# Altium PCB UM_10.PcbDoc (part 2 of 3)
Units mil, origin at the board's own origin, x right, y up, seen from the top; angles counter-clockwise.
Board outline 3937.01 x 3937.01 mil, 4 copper layers (Top, GND_02, PWR_03, Bottom), stack 35.4 mil thick; 347 components, 178 nets, 1059 pads, 909 vias.
Unrouted connection lines stored in the file: 2.
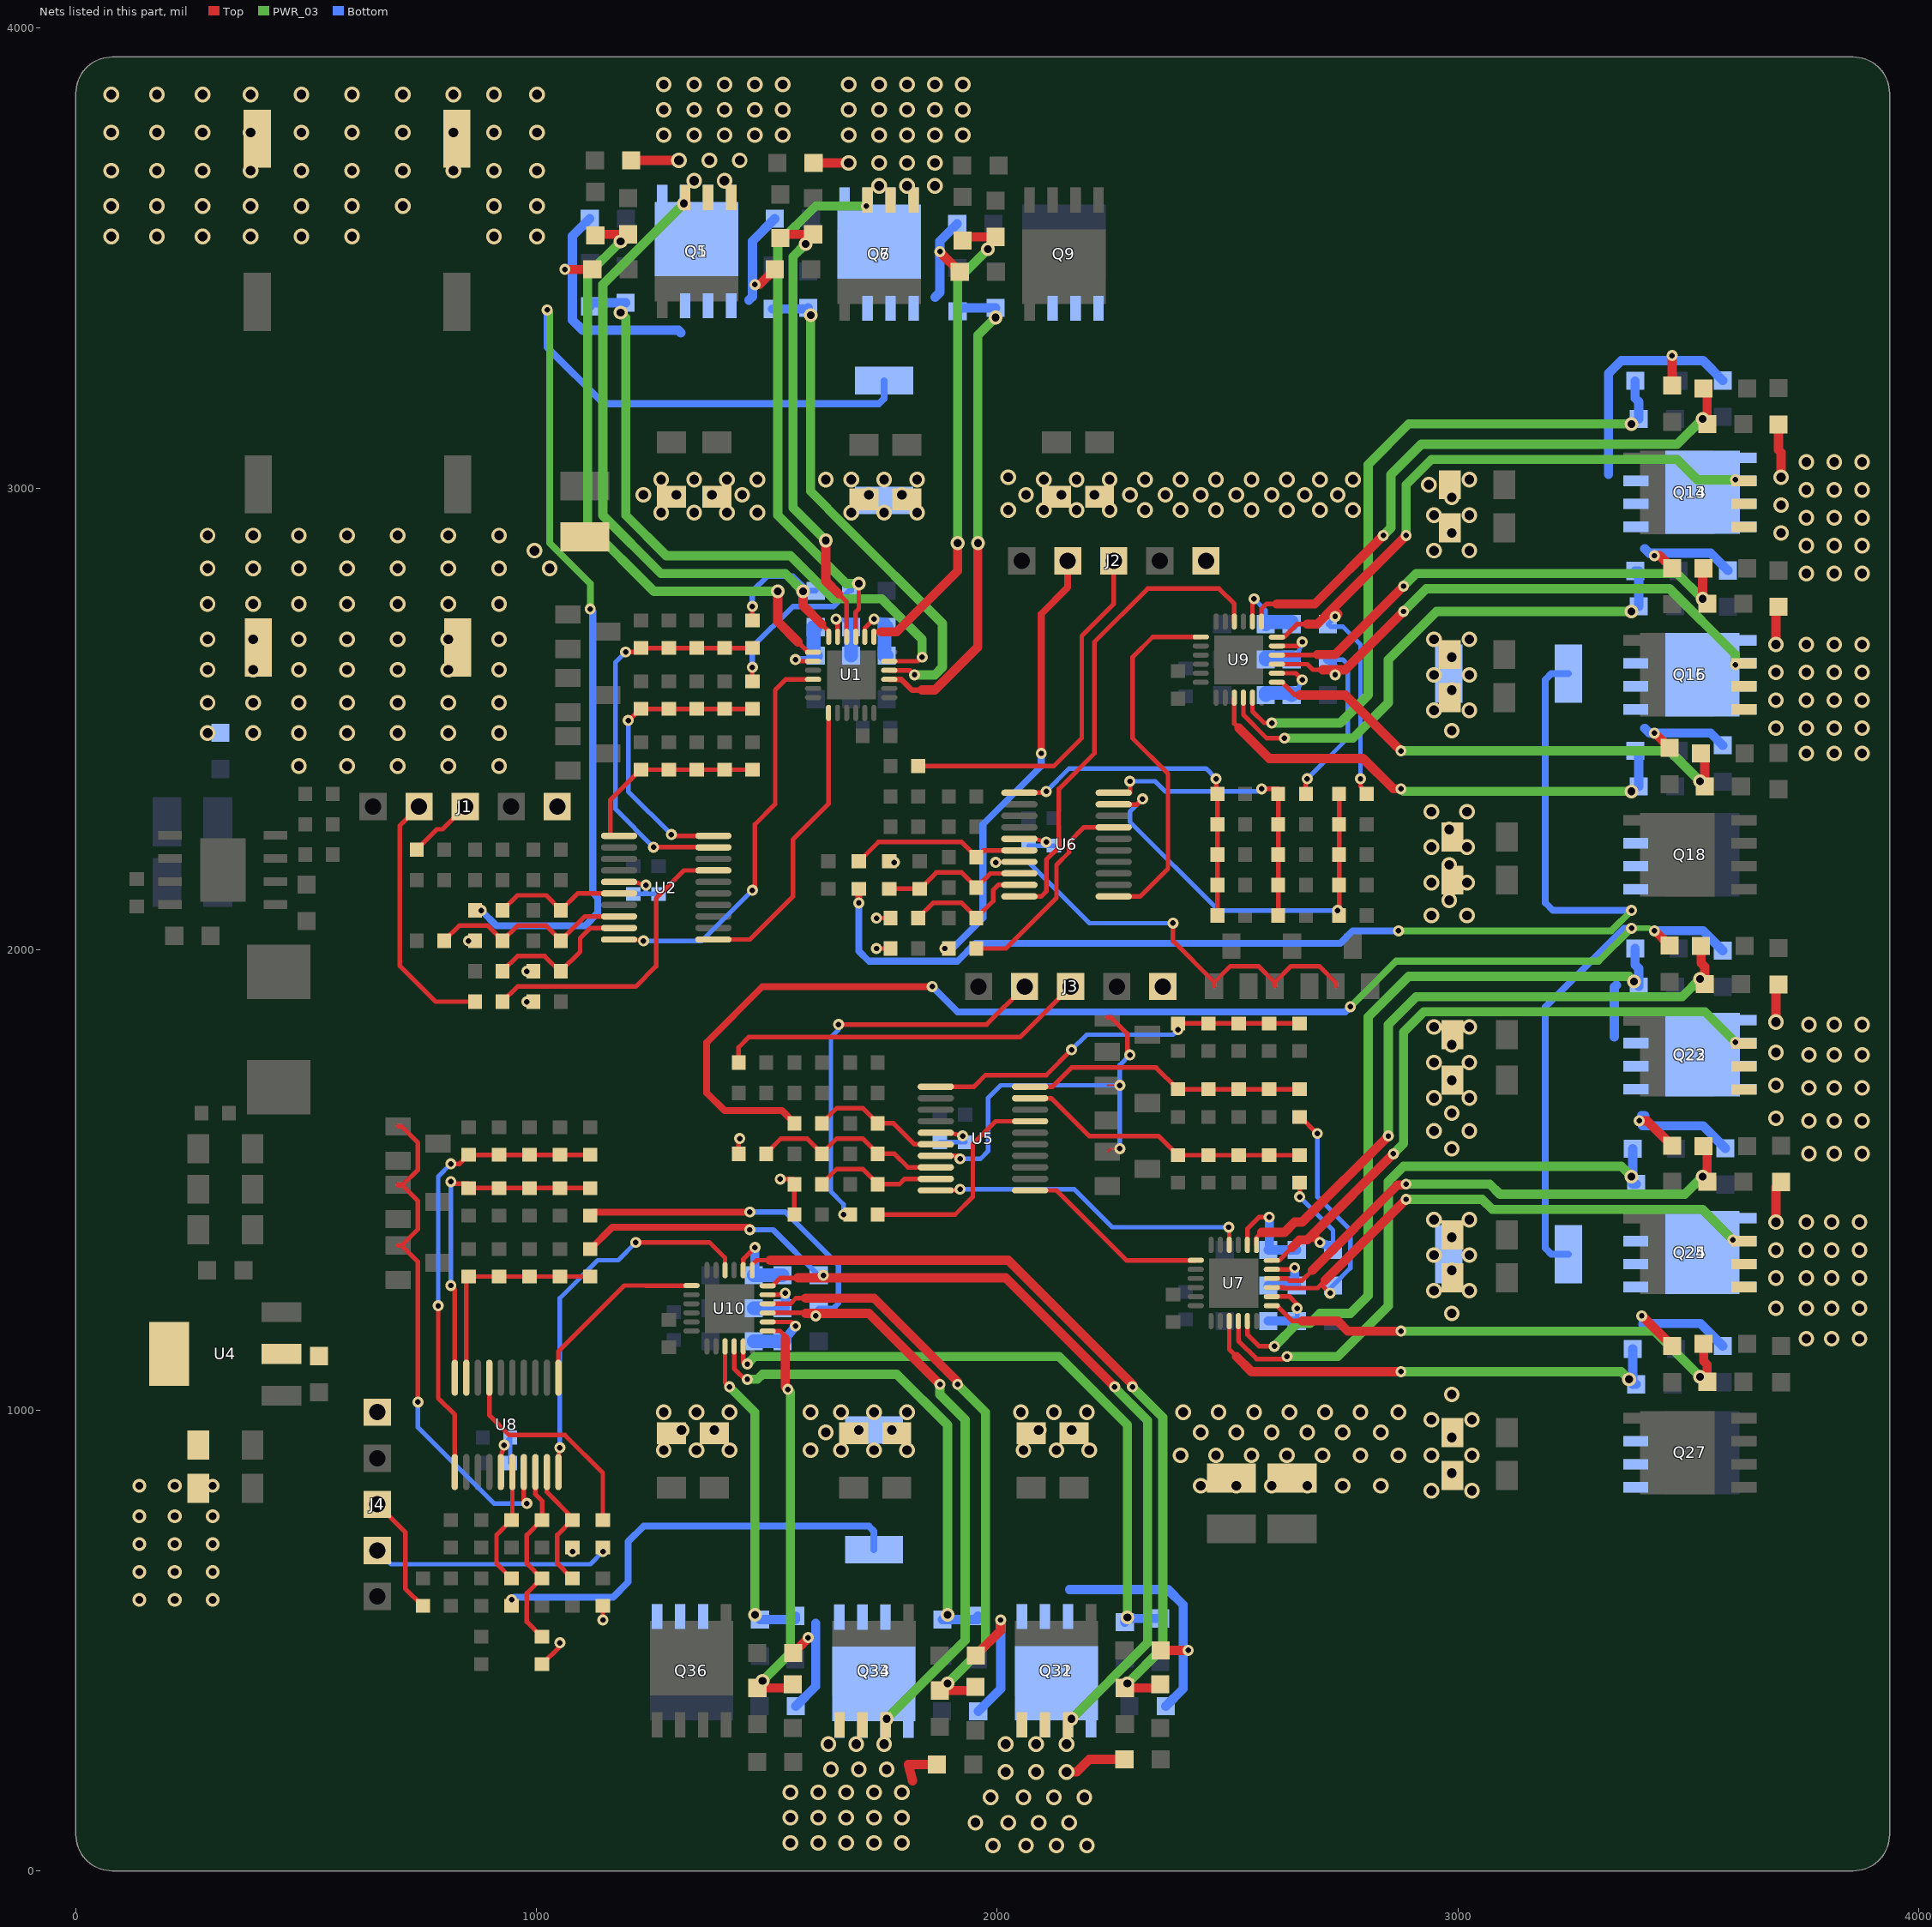
[diagram p4: the nets of this part, all layers, seen from the top]

## Via types
v1: diameter 34, hole 21, Top to Bottom, 505 vias
v2: diameter 24, hole 12, Top to Bottom, 272 vias
v3: diameter 30, hole 17, Top to Bottom, 132 vias

## Nets (pads, with @x,y where several pads share a name; then routed paths per layer and width w, separated by ;. In a path a pad name is that pad's centre, name@x,y a point inside that pad or via, vN(x,y) a via of type N, cw(c..) or ccw(c..) an arc to the next point about the centre after c; other vN are vias at no path point) (continued)
EMF_ON_2: U6.7 | length 1011.8
  Top w10: v2(1996.5,2189) 1997.5,2190 U6.7@2048.14,2190 ; v2(2381.5,2057) 2381.5,2018.5 2470.6,1929.4 2470.6,1920.19 2470.6,1928.07 2506.03,1963.5 2567.17,1963.5 2602.6,1928.07 ; 2602.6,1920.19 2602.6,1928.07 ; 2734.6,1920.19 2734.6,1928.07 2699.17,1963.5 2638.03,1963.5 2602.6,1928.07
  Bottom w10: v2(1996.5,2189) 2068,2189 2200,2057 v2(2381.5,2057)
EMF_ON_3: U5.7 | length 911.4
  Top w4: 2239.19,1560.9 2245.79,1567.5 v2(2266,1567.5) ; 2239.19,1703.9 2240.29,1705 v2(2266,1705)
  Top w10: U5.7@1866.64,1552 1913,1552 v2(1919.5,1545.5) ; 2239.19,1852.4 2247.07,1852.4 2282.5,1816.97 2282.5,1776.5 v2(2288,1771)
  Bottom w10: v2(1919.5,1545.5) 1963.5,1545.5 1980,1562 1980,1677.5 2007.5,1705 v2(2266,1705) ; v2(2266,1567.5) v2(2266,1705) ; v2(2288,1771) 2266,1749 v2(2266,1705)
EMF_ON_4: U8.7 | length 1138.1
  Top w10: 699.19,1357.4 707.07,1357.4 ; 699.19,1615.9 707.07,1615.9 742.5,1580.47 742.5,1521.6 708.68,1487.79 699.19,1487.79 699.19,1489.4 707.07,1489.4 742.5,1453.97 742.5,1392.83 707.07,1357.4 ; v2(742.5,1017.5) 742.5,1321.97 707.07,1357.4 ; U8.7@972.5,865.64 972.5,804 v2(979,797.5)
  Bottom w10: v2(742.5,1017.5) 742.5,962.5 907.5,797.5 v2(979,797.5)
EMFA_1: C14.1 R7.2 R25.2 R26.2 R27.1 U2.19 | length 877.6
  Top w10: v2(1193.5,2645.5) 1221,2645.5 1221,2648.58 R7.2@1226.5,2654.08 R27.1@1287,2654.08 C14.1@1347.5,2654.08 R26.2@1408,2654.08 R25.2@1468.5,2654.08 ; v2(1254,2222) 1383.86,2222 U2.19@1383.86,2221.5 U2.19@1383.86,2221.64
  Bottom w10: v2(1193.5,2645.5) 1171.5,2623.5 1171.5,2304.5 v2(1254,2222)
EMFA_2: C56.1 R47.2 R65.2 R66.2 R67.1 U6.19 | length 926.3
  Top w4: v2(2739,2084.5) 2742.08,2081.42 R47.2@2742.08,2073.5
  Top w10: U6.19@2252.86,2315 2252.86,2314.48 2303.48,2314.48 v2(2315.5,2326.5) ; v2(2739,2084.5) 2742.08,2087.58 R67.1@2742.08,2139.5 C56.1@2742.08,2205.5 R66.2@2742.08,2271.5 R65.2@2742.08,2337.5
  Bottom w10: v2(2315.5,2326.5) 2288,2299 2288,2277 2480.5,2084.5 v2(2739,2084.5)
EMFA_3: C73.1 R83.2 R101.2 R102.2 R103.1 U5.19 | length 636.3
  Top w10: U5.19@2071.36,1677 2117.5,1677 2199.5,1595 2350.13,1595 2391.71,1553.42 R83.2@2392.5,1553.42 R103.1@2458.5,1553.42 C73.1@2524.5,1553.42 R102.2@2590.5,1553.42 R101.2@2656.5,1553.42
EMFA_4: C99.1 R119.2 R137.2 R138.2 R139.1 U8.19 | length 485.8
  Top w10: U8.19@847.5,1070.36 847.5,1285.08 R119.2@852.5,1290.08 R139.1@918.5,1290.08 C99.1@984.5,1290.08 R138.2@1050.5,1290.08 R137.2@1116.5,1290.08
EMFB_1: C15.1 R6.2 R28.2 R29.2 R30.1 U2.20 | length 658.7
  Top w10: v2(1199,2497) 1200.63,2497 1225.71,2522.08 R6.2@1226.5,2522.08 R30.1@1287,2522.08 C15.1@1347.5,2522.08 R29.2@1408,2522.08 R28.2@1468.5,2522.08 ; v2(1292.5,2249.5) 1295.5,2246.5 U2.20@1383.86,2246.5
  Bottom w10: v2(1199,2497) 1199,2343 v2(1292.5,2249.5)
EMFB_2: C57.1 R46.2 R68.2 R69.2 R70.1 U6.20 | length 670.9
  Top w10: U6.20@2252.86,2340 2288,2340 v2(2288,2365) ; v2(2574,2348.5) 2610.08,2348.5 R68.2@2610.08,2337.5 R69.2@2610.08,2271.5 C57.1@2610.08,2205.5 R70.1@2610.08,2139.5 R46.2@2610.08,2073.5
  Bottom w10: v2(2288,2365) 2343,2365 2365,2343 2563,2343 2571.25,2351.25 v2(2574,2348.5)
EMFB_3: C74.1 R82.2 R104.2 R105.2 R106.1 U5.20 | length 621.8
  Top w10: U5.20@2071.36,1702 2120,1702 2161.5,1743.5 2344.63,1743.5 2391.71,1696.42 R82.2@2392.5,1696.42 R106.1@2458.5,1696.42 C74.1@2524.5,1696.42 R105.2@2590.5,1696.42 R104.2@2656.5,1696.42
EMFB_4: C100.1 R118.2 R140.2 R141.2 R142.1 U8.20 | length 745.7
  Top w10: v2(814,1270.5) 822.5,1262 U8.20@822.5,1070.36 ; v2(814,1496) 814,1491.29 852.5,1491.29 R118.2@852.5,1481.92 R142.1@918.5,1481.92 C100.1@984.5,1481.92 R141.2@1050.5,1481.92 R140.2@1116.5,1481.92
  Bottom w10: v2(814,1270.5) v2(814,1496)
EMFC_1: C16.1 R5.2 R31.2 R32.2 R33.1 U2.1 | length 432
  Top w10: U2.1@1179.14,2246.5 1160.5,2246.5 1160.5,2324.87 1225.71,2390.08 R5.2@1226.5,2390.08 R33.1@1287,2390.08 C16.1@1347.5,2390.08 R32.2@1408,2390.08 R31.2@1468.5,2390.08
EMFC_2: C58.1 R45.2 R71.2 R72.2 R73.1 U6.1 | length 757.8
  Top w10: U6.1@2048.14,2340 2103.5,2340 v2(2106.5,2343) ; v2(2475,2370.5) 2475,2337.5 R71.2@2478.08,2337.5 R72.2@2478.08,2271.5 C58.1@2478.08,2205.5 R73.1@2478.08,2139.5 R45.2@2478.08,2073.5
  Bottom w10: v2(2106.5,2343) 2156,2392.5 2453,2392.5 v2(2475,2370.5)
EMFC_3: C75.1 R81.2 R107.2 R108.2 R109.1 U5.1 | length 863.6
  Top w4: v2(2392.5,1826) 2389.42,1826 R81.2@2392.5,1839.42
  Top w10: U5.1@1866.64,1702 1949.5,1702 1974.5,1727 2106.5,1727 v2(2161.5,1782) v2@2156,1782 ; R81.2@2392.5,1839.42 R109.1@2458.5,1839.42 C75.1@2524.5,1839.42 R108.2@2590.5,1839.42 R107.2@2656.5,1839.42
  Bottom w10: v2(2161.5,1782) 2194.5,1815 2381.5,1815 v2(2392.5,1826)
EMFC_4: C101.1 R117.2 R143.2 R144.2 R145.1 U8.1 | length 1005.8
  Top w10: v2(786.5,1226.5) 786.5,1026 822.5,990 U8.1@822.5,865.64 ; v2(814,1534.5) 832.92,1534.5 R117.2@852.5,1554.08 R145.1@918.5,1554.08 C101.1@984.5,1554.08 R144.2@1050.5,1554.08 R143.2@1116.5,1554.08
  Bottom w10: v2(786.5,1226.5) 786.5,1507 v2(814,1534.5)
GND: C7.2 C30.2 C31.2 C32.2 C33.2 C34.2 C35.2 C36.2 C37.2 C38.2 C39.2 C40.2 C41.2 C78.2 C79.2 C80.2 C81.2 C82.2 C83.2 C84.2 C85.2 C103.2 C104.2 C105.2 C106.2 C107.2 C108.2 C109.2 C110.2 C111.2 C112.2 R35.1 R37.1 R74.1 R110.1 R146.1
  other v1: 2942.5,825 3030.5,825 2442,836 2519,836 2596,836 2673,836 2750,836 2832.5,836 2986.5,863.5 2398,902 2475,902 2552,902 2629,902 2706,902 2788.5,902 2871,902 2942.5,902 3030.5,902 1276,913 1347.5,913 1419,913 1595,913 1661,913 1732.5,913 1804,913 2057,913 2128.5,913 2200,913 2986.5,940.5 1628,951.5 2442,951.5 2519,951.5 2596,951.5 2673,951.5 2750,951.5 2832.5,951.5 1314.5,957 1386,957 1699.5,957 1771,957 2090,957 2161.5,957 2942.5,979 3030.5,979 1276,995.5 1347.5,995.5 1419,995.5 1595,995.5 1661,995.5 1732.5,995.5 1804,995.5 2051.5,995.5 2123,995.5 2194.5,995.5 2403.5,995.5 2480.5,995.5 2557.5,995.5 2634.5,995.5 2711.5,995.5 2788.5,995.5 2871,995.5 2986.5,1034 2986.5,1210 2948,1259.5 3025,1259.5 2986.5,1303.5 2948,1336.5 3025,1336.5 2986.5,1375 2948,1413.5 3025,1413.5 2986.5,1567.5 2948,1606 3025,1606 2986.5,1644.5 2948,1677.5 3025,1677.5 2986.5,1716 2948,1754.5 3025,1754.5 2986.5,1793 2948,1831.5 3025,1831.5 2942.5,2073.5 3019.5,2073.5 2981,2106.5 2942.5,2145 3019.5,2145 2981,2183.5 2942.5,2222 3019.5,2222 2981,2260.5 2942.5,2299 3019.5,2299 484,2398 588.5,2398 698.5,2398 808.5,2398 918.5,2398 286,2469.5 385,2469.5 484,2469.5 588.5,2469.5 698.5,2469.5 808.5,2469.5 918.5,2469.5 2986.5,2475 2948,2519 3025,2519 286,2535.5 385,2535.5 484,2535.5 588.5,2535.5 698.5,2535.5 808.5,2535.5 918.5,2535.5 2986.5,2563 2948,2596 3025,2596 286,2607 385,2607 484,2607 588.5,2607 698.5,2607 808.5,2607 918.5,2607 2986.5,2634.5 286,2673 385,2673 484,2673 588.5,2673 698.5,2673 808.5,2673 918.5,2673 2948,2673 3025,2673 286,2750 385,2750 484,2750 588.5,2750 698.5,2750 808.5,2750 918.5,2750 286,2827 385,2827 484,2827 588.5,2827 698.5,2827 808.5,2827 918.5,2827 1028.5,2827 995.5,2865.5 2948,2865.5 3025,2865.5 286,2898.5 385,2898.5 484,2898.5 588.5,2898.5 698.5,2898.5 808.5,2898.5 918.5,2898.5 2986.5,2904 2948,2942.5 3025,2942.5 1270.5,2948 1342,2948 1413.5,2948 1479.5,2948 1683,2948 1754.5,2948 1826,2948 2024,2953.5 2101,2953.5 2172.5,2953.5 2244,2953.5 2321,2953.5 2398,2953.5 2475,2953.5 2552,2953.5 2629,2953.5 2700.5,2953.5 2772,2953.5 2986.5,2981 1232,2986.5 1303.5,2986.5 1380.5,2986.5 1446.5,2986.5 1721.5,2986.5 1793,2986.5 2062.5,2986.5 2139.5,2986.5 2211,2986.5 2288,2986.5 2365,2986.5 2442,2986.5 2519,2986.5 2596,2986.5 2667.5,2986.5 2739,2986.5 2937,3008.5 1270.5,3019.5 1342,3019.5 1413.5,3019.5 1479.5,3019.5 1628,3019.5 1683,3019.5 1754.5,3019.5 1826,3019.5 2101,3019.5 2172.5,3019.5 2244,3019.5 2321,3019.5 2398,3019.5 2475,3019.5 2552,3019.5 2629,3019.5 2700.5,3019.5 2772,3019.5 3025,3019.5 2024,3025 77,3547.5 176,3547.5 275,3547.5 379.5,3547.5 489.5,3547.5 599.5,3547.5 907.5,3547.5 1001,3547.5 77,3613.5 176,3613.5 275,3613.5 379.5,3613.5 489.5,3613.5 599.5,3613.5 709.5,3613.5 907.5,3613.5 1001,3613.5 77,3690.5 176,3690.5 275,3690.5 379.5,3690.5 489.5,3690.5 599.5,3690.5 709.5,3690.5 819.5,3690.5 907.5,3690.5 1001,3690.5 77,3773 176,3773 275,3773 379.5,3773 489.5,3773 599.5,3773 709.5,3773 819.5,3773 907.5,3773 1001,3773 77,3855.5 176,3855.5 275,3855.5 379.5,3855.5 489.5,3855.5 599.5,3855.5 709.5,3855.5 819.5,3855.5 907.5,3855.5 1001,3855.5
HO1_1: D4.1 R9.2 U1.19 | length 1361.1
  Top w10: 1567.5,2667.5 1589.5,2645.5 1600.04,2645.5 U1.19@1600.32,2645.21
  Top w20: D4.1@1127.5,3549.76 1127.5,3552.13 R9.2@1199,3552.13 ; v3(1523.5,2777.5) 1523.5,2711.5 1567.5,2667.5
  PWR_03 w20: v3(1182.5,3536.5) 1111,3465 1111,2921.13 1254.63,2777.5 v3(1523.5,2777.5)
HO1_2: D13.1 R49.2 U9.19 | length 1307.8
  Top w10: U9.19@2573.71,2711.68 2573.71,2738.71 2585,2750 2607,2750
  Top w20: 2607,2750 2689.5,2750 v2(2838,2898.5) ; D13.1@3533.26,3217.5 3541.13,3217.5 R49.2@3541.13,3140.5
  PWR_03 w20: v2(2838,2898.5) 2854.5,2915 2854.5,3030.5 2920.5,3096.5 3476,3096.5 v3(3531,3151.5)
HO1_3: D22.1 R85.2 U7.19 | length 1438.8
  Top w10: U7.19@2562.71,1358.68 2562.71,1374.71 2574,1386
  Top w20: 2574,1386 2623.5,1386 2645.5,1408 2662,1408 v2(2849,1595) ; D22.1@3527.76,2007.5 3527.76,1970.19 3535.63,1962.31 R85.2@3535.63,1925
  PWR_03 w20: v2(2849,1595) 2849,1837 2909.5,1897.5 3487,1897.5 v3(3525.5,1936)
HO1_4: D31.1 R121.2 U10.19 | length 1746.2
  Top w10: U10.19@1468.21,1303.68 1468.21,1315.88 1477.83,1325.5 1507,1325.5
  Top w20: 1507,1325.5 2024,1325.5 2293.5,1056 v2(2293.5,1050.5) ; R121.2@2277,396.87 2354,396.87 D31.1@2354,404.74
  PWR_03 w20: v3(2282.5,407) 2359.5,484 2359.5,984.5 v2(2293.5,1050.5)
HO2_1: D6.1 R13.2 U1.16 | length 991.4
  Top w10: 1655.5,2772 1673.16,2754.34 U1.16@1673.16,2678.68
  Top w20: D6.1@1529,3544.26 1529,3552.13 R13.2@1600.5,3552.13 ; v3(1628,2887.5) 1628,2799.5 1655.5,2772
  PWR_03 w20: v3(1584,3531) 1556.5,3503.5 1556.5,2959 v3(1628,2887.5)
HO2_2: D15.1 R53.2 U9.16 | length 1088.9
  Top w10: U9.16@2607.18,2638.84 2695,2638.84 2695,2640
  Top w20: 2695,2640 2733.5,2640 v2(2882,2788.5) ; v3(3531,2761) 3531,2827 D15.1@3533.26,2827
  PWR_03 w20: v2(2882,2788.5) 2909.5,2816 3476,2816 v3(3531,2761)
HO2_3: D24.1 R89.2 U7.16 | length 1134.2
  Top w10: U7.16@2596.18,1285.84 2630.16,1285.84 2634.5,1281.5 2662,1281.5 2684,1303.5
  Top w20: 2684,1303.5 2869.08,1488.58 2887.5,1488.58 v2(2887.5,1490.5) ; D24.1@3533.26,1573 3541.13,1573 R89.2@3541.13,1496
  PWR_03 w20: v2(2887.5,1490.5) 3069,1490.5 3091,1468.5 3492.5,1468.5 v3(3531,1507)
HO2_4: D33.1 R125.2 U10.16 | length 1291.1
  Top w10: U10.16@1501.68,1230.84 1551,1230.84 1563.16,1243 1584,1243
  Top w20: 1584,1243 1732.5,1243 1914,1061.5 v2(1914,1056) ; R125.2@1875.5,391.37 1952.5,391.37 D33.1@1952.5,399.24
  PWR_03 w20: v3(1892,407) 1974.5,489.5 1974.5,995.5 v2(1914,1056)
HO3_1: D8.1 R17.2 U1.13 | length 1052.3
  Top w10: U1.13@1732.21,2678.68 1732.21,2689.21 1732.5,2689.5 1749,2689.5
  Top w20: 1749,2689.5 1782,2689.5 1914,2821.5 v3(1914,2882) ; D8.1@1925,3538.76 1925,3546.63 R17.2@1996.5,3546.63
  PWR_03 w20: v3(1914,2882) 1914,3454 v3(1980,3520)
HO3_2: D17.1 R57.2 U9.13 | length 1097.6
  Top w10: U9.13@2618,2579.5 2607.46,2579.5 U9.13@2607.18,2579.79 2618,2579.79 2645.79,2552 2656.5,2552
  Top w20: 2656.5,2552 2755.5,2552 v2(2876.5,2431) ; D17.1@3527.76,2425.5 3535.63,2425.5 R57.2@3535.63,2354
  PWR_03 w20: v2(2876.5,2431) 3459.5,2431 v3(3525.5,2365)
HO3_3: D26.1 R93.2 U7.13 | length 1079
  Top w10: U7.13@2596.18,1226.79 2607,1226.79 2640.29,1193.5 2662,1193.5
  Top w20: 2662,1193.5 2739,1193.5 2761,1171.5 v2(2876.5,1171.5) ; D26.1@3533.26,1144 3533.26,1106.69 3541.13,1098.81 R93.2@3541.13,1061.5
  PWR_03 w20: v2(2876.5,1171.5) 3426.5,1171.5 v3(3525.5,1072.5)
HO3_4: D35.1 R129.2 U10.13 | length 905.5
  Top w10: U10.13@1501.68,1171.79 1528.71,1171.79 1540,1160.5 1540,1155
  Top w20: R129.2@1479.5,396.87 1556.5,396.87 D35.1@1556.5,404.74 ; 1540,1155 1540,1050.5 v2(1545.5,1045)
  PWR_03 w20: v3(1490.5,412.5) 1551,473 1551,1039.5 v2(1545.5,1045)
IOUT_1: C10.2 C11.2 C12.2 Q5.1 Q5.2 Q5.3 Q7.1 Q7.2 Q7.3 Q9.1 Q9.2 Q9.3 R10.1 R14.1 R18.1 R35.2 R36.2 | length 3615.2
  Top w10: R36.2@866.58,2084.5 v2(880,2084.5)
  Top w20: v2(1061.5,3476) C10.2@1121.13,3476 ; v2(1474,3443) 1484.13,3443 C11.2@1517.13,3476 ; v2(1875.5,3514.5) 1875.5,3513.63 C12.2@1918.63,3470.5
  PWR_03 w15: v2(1023,3388) 1028.5,3382.5 1028.5,2882 1116.5,2794 v2(1116.5,2739)
  Bottom w15: v2(880,2084.5) 913,2051.5 1105.5,2051.5 1133,2079 1133,2112 1122,2123 1122,2733.5 v2(1116.5,2739) ; v2(1023,3388) 1023,3307.15 1145.65,3184.5 1743.5,3184.5 1754.5,3195.5 1754.5,3234.44 R35.2@1754.28,3234.66
  Bottom w20: v2(1061.5,3476) 1078,3476 ; R10.1@1115.63,3586 1078,3548.37 1078,3476 ; 1313.5,3338.5 1308,3344 1100,3344 1078,3366 1078,3476 ; 1460.76,3409.42 1468.5,3416.5 v2@1468.5,3443 ; v2(1474,3443) v2@1468.5,3443 ; R14.1@1517.13,3586 1468.5,3537.37 v2@1468.5,3443 ; 1865.15,3415.6 1875.5,3425.96 v2(1875.5,3514.5) 1875.5,3537.37 R18.1@1913.13,3575
IOUT_2: C52.2 C53.2 C54.2 Q14.1 Q14.2 Q14.3 Q16.1 Q16.2 Q16.3 Q18.1 Q18.2 Q18.3 R50.1 R54.1 R58.1 R74.2 R75.2 | length 3659.9
  Top w15: v2(1699.5,2101) R75.2@1699.5,2131.58
  Top w20: v2(3426.5,2469.5) 3427.37,2469.5 C54.2@3459.5,2437.37 ; v2(3426.5,2854.5) 3426.63,2854.63 3438.24,2854.63 C52.2@3465,2827.87 ; C53.2@3465,3223.87 v2(3465,3289)
  PWR_03 w15: v2(2871,2040.5) 3333,2040.5 v2(3377,2084.5)
  Bottom w15: v2(1699.5,2101) 1699.5,1996.5 1721.5,1974.5 1914,1974.5 1952.5,2013 2744.5,2013 2772,2040.5 v2(2871,2040.5) ; R74.2@3240.16,2598.43 3202.74,2598.43 3190,2585.69 3190,2101 3206.5,2084.5 v2(3377,2084.5)
  Bottom w20: 3327.09,3031.5 3327.09,3250.09 3355,3278 v2@3465,3278 ; 3405.5,2479.99 3415.87,2469.63 v2@3426.5,2469.63 ; 3405.5,2870 3415.5,2860 v2@3426.5,2860 ; v2(3426.5,2469.5) v2@3426.5,2469.63 ; v2(3426.5,2854.5) v2@3426.5,2860 ; v2(3465,3289) v2@3465,3278 ; R58.1@3575,2442.87 3548.24,2469.63 v2@3426.5,2469.63 ; R50.1@3575,3234.87 3531.87,3278 v2@3465,3278 ; R54.1@3586,2822.37 3548.37,2860 v2@3426.5,2860
IOUT_3: C69.2 C70.2 C71.2 Q23.1 Q23.2 Q23.3 Q25.1 Q25.2 Q25.3 Q27.1 Q27.2 Q27.3 R86.1 R90.1 R94.1 R110.2 R111.2 | length 4326.2
  Top w15: R111.2@1559.58,1622.5 1559.58,1623.29 1532.87,1650 1408,1650 1369.5,1688.5 1369.5,1798.5 1490.5,1919.5 v2(1859,1919.5)
  Top w20: v2(3393.5,1628) 3410.87,1628 C69.2@3465,1573.87 ; v2(3399,1204.5) 3399.87,1204.5 C71.2@3465,1139.37 ; v2(3426.5,2040.5) 3426.5,2041.37 C70.2@3459.5,2008.37
  PWR_03 w12: v2(3377,2046) 3415.5,2046 v2(3426.5,2040.5)
  PWR_03 w15: v2(2766.5,1875.5) 2865.5,1974.5 3305.5,1974.5 v2(3377,2046)
  Bottom w15: v2(1859,1919.5) 1914,1864.5 2755.5,1864.5 v2(2766.5,1875.5) ; R110.2@3240.16,1338.58 3202.74,1338.58 3190,1351.32 3190,1875.5 3360.5,2046 v2(3377,2046)
  Bottom w20: 3339.61,1810.5 3339.61,1918.04 3344,1922.43 ; 3402.59,1191.89 3408.43,1186.05 3401.15,1186.05 3403.11,1188 3526.37,1188 R94.1@3575,1139.37 ; 3405.5,1639 3398.57,1639 3398.57,1638.31 3398.71,1638.31 3400.71,1636.31 3400.71,1617 3531.87,1617 R90.1@3580.5,1568.37 ; v2(3426.5,2040.5) 3531.87,2040.5 R86.1@3575,1997.37
IOUT_4: C95.2 C96.2 C97.2 Q32.1 Q32.2 Q32.3 Q34.1 Q34.2 Q34.3 Q36.1 Q36.2 Q36.3 R122.1 R126.1 R130.1 R146.2 R147.2 | length 2107.1
  Top w4: R147.2@946,575.08 v2(946,588.5)
  Top w20: C97.2@1557.37,473 1589.5,505.13 v2(1589.5,506) ; C96.2@1953.37,467.5 2007.5,521.63 v2(2007.5,544.5) ; C95.2@2354.87,478.5 v2(2414.5,478.5)
  Bottom w15: v2(946,588.5) 951.5,594 1166,594 1199,627 1199,715 1232,748 1721.5,748 1732.28,737.22 R146.2@1732.28,696.85
  Bottom w20: R130.1@1562.87,357.5 1606,400.63 1606,506 ; v2(1589.5,506) 1606,506 ; 1606.22,537.3 1606,532.5 1606,506 ; R126.1@1958.87,346.5 2007.5,395.13 2007.5,532.5 v2@2006.86,544.94 ; 2157,610.64 2370.36,610.64 2403.5,577.5 v2@2403.5,478.5 ; R122.1@2365.87,357.5 2403.5,395.13 v2@2403.5,478.5 ; v2(2414.5,478.5) v2@2403.5,478.5
IS_1: C29.1 R36.1 U2.6 | length 296
  Top w10: R36.1@926.42,2084.5 926.42,2085.29 958.63,2117.5 1020.71,2117.5 C29.1@1052.92,2085.29 ; C29.1@1052.92,2084.5 C29.1@1052.92,2085.29 ; U2.6@1179.14,2121.5 1089.13,2121.5 C29.1@1052.92,2085.29
IS_2: C59.1 R75.1 U6.6 | length 386.2
  Top w10: R75.1@1699.5,2191.42 1700.29,2191.42 1741.87,2233 1922.71,2233 1954.92,2200.79 C59.1@1954.92,2200 1969.92,2215 U6.6@2048.14,2215
IS_3: C76.1 R111.1 U5.6 | length 294.3
  Top w10: R111.1@1619.42,1622.5 1619.42,1623.29 1651.63,1655.5 1708.21,1655.5 1740.42,1623.29 C76.1@1740.42,1622.5 1775,1622.5 1820.5,1577 U5.6@1866.64,1577
IS_4: C102.1 R147.1 U8.6 | length 259.6
  Top w10: R147.1@946,634.92 945.21,634.92 913,667.13 913,729.21 945.21,761.42 C102.1@946,761.42 947.5,762.92 U8.6@947.5,865.64
LO1_1: D5.1 R11.2 U1.11 | length 1398.1
  Top w10: U1.11@1765.68,2625.53 1828.03,2625.53 v2(1837,2634.5)
  PWR_03 w20: v3(1182.5,3382.5) 1193.5,3371.5 1193.5,2942.5 1281.5,2854.5 1551,2854.5 1644.5,2761 1749,2761 1837,2673 v2(1837,2634.5)
  Bottom w20: D5.1@1116.5,3395.76 1116.5,3403.63 R11.2@1193.5,3403.63
LO1_2: D14.1 R51.2 U9.11 | length 1533.4
  Top w10: U9.11@2554.03,2546.32 2554.03,2516.97 2579.5,2491.5 v2(2596,2491.5)
  PWR_03 w20: v2(2596,2491.5) 2744.5,2491.5 2805,2552 2805,3052.5 2893,3140.5 v3(3377,3140.5)
  Bottom w10: v3(3377,3140.5) 3378.16,3139.34 3391.47,3152.66 3391.47,3151.5 R51.2@3392.63,3151.5
  Bottom w20: D14.1@3384.76,3234 3384.76,3196.69 3392.63,3188.81 R51.2@3392.63,3151.5
LO1_3: D23.1 R87.2 U7.11 | length 1656.7
  Top w10: U7.11@2543.03,1193.32 2543.03,1163.97 2568.5,1138.5 v2(2601.5,1138.5)
  PWR_03 w20: v2(2601.5,1138.5) 2651,1188 2678.5,1188 2700.5,1210 2766.5,1210 2805,1248.5 2805,1853.5 2893,1941.5 3371.5,1941.5 v3(3382.5,1930.5)
  Bottom w20: D23.1@3384.76,2002 3384.76,1966.74 3392.63,1958.87 R87.2@3392.63,1919.5
LO1_4: D32.1 R123.2 U10.11 | length 1443.8
  Top w10: U10.11@1448.53,1138.32 1448.53,1103.47 1454.75,1097.25 v2(1457.5,1100)
  PWR_03 w20: v2(1457.5,1100) 1474,1116.5 2134,1116.5 2282.5,968 v3(2282.5,550)
  Bottom w20: R123.2@2277,539.87 2277,547.74 D32.1@2354,547.74
LO2_1: D7.1 R15.2 U1.10 | length 1088.2
  Top w10: U1.10@1765.68,2605.84 1810.66,2605.84 v2(1820.5,2596)
  PWR_03 w20: v3(1595,3377) 1595,2994.83 1671.26,2917.16 1881,2707.42 1881,2612.5 1864.5,2596 v2(1820.5,2596)
  Bottom w20: D7.1@1512.5,3390.26 1589.5,3390.26 R15.2@1589.5,3392.63
LO2_2: D16.1 R55.2 U9.10 | length 1154.4
  Top w10: U9.10@2534.34,2546.32 2534.34,2509.16 2585,2458.5 v2(2623.5,2458.5)
  PWR_03 w20: v2(2623.5,2458.5) 2772,2458.5 2849,2535.5 2849,2629 2953.5,2733.5 v3(3377,2733.5)
  Bottom w20: D16.1@3384.76,2821.5 3392.63,2821.5 R55.2@3392.63,2744.5
LO2_3: D25.1 R91.2 U7.10 | length 1337.7
  Top w10: U7.10@2523.34,1193.32 2523.34,1150.66 2563,1111 2623.5,1111 v2(2629,1116.5)
  PWR_03 w20: v2(2629,1116.5) 2739,1116.5 2849,1226.5 2849,1496 2882,1529 3355,1529 v3(3377,1507)
  Bottom w20: D25.1@3379.26,1567.5 3379.26,1490.5 R91.2@3387.13,1490.5
LO2_4: D34.1 R127.2 U10.10 | length 1076.2
  Top w10: U10.10@1428.84,1138.32 1428.84,1090.16 1457.5,1061.5 v2(1457.5,1067)
  PWR_03 w20: v2(1457.5,1067) 1479.5,1067 1490.5,1078 1782,1078 1892,968 v3(1892,555.5)
  Bottom w20: R127.2@1881,545.37 1958,545.37 D34.1@1958,553.24
LO3_1: D9.1 R19.2 U1.9 | length 1057.4
  Top w12: U1.9@1765.68,2586.16 1791.84,2586.16 1815,2563 1837,2563
  Top w20: 1837,2563 1864.5,2563 1958,2656.5 v3(1958,2882)
  PWR_03 w20: v3(1958,2882) 1958,3333 v3(1996.5,3371.5)
  Bottom w20: D9.1@1914,3384.76 1921.87,3392.63 R19.2@1996.5,3392.63
LO3_2: D18.1 R59.2 U9.9 | length 1064.2
  Top w10: U9.9@2514.66,2546.32 2514.66,2490.34 2524.5,2480.5
  Top w20: 2524.5,2480.5 2590.5,2414.5 2794,2414.5 2860,2348.5 v2(2876.5,2348.5)
  PWR_03 w20: v2(2876.5,2348.5) 2882,2343 v3(3377,2343)
  Bottom w20: D18.1@3384.76,2431 3392.63,2431 R59.2@3392.63,2354
LO3_3: D27.1 R95.2 U7.9 | length 1041.1
  Top w10: U7.9@2503.66,1193.32 2503.66,1131.84 2519,1116.5
  Top w20: 2519,1116.5 2552,1083.5 v2(2876.5,1083.5)
  PWR_03 w20: v2(2876.5,1083.5) 3355,1083.5 v3(3371.5,1067)
  Bottom w20: D27.1@3379.26,1133 3379.26,1056 R95.2@3387.13,1056
LO3_4: D36.1 R131.2 U10.9 | length 694.6
  Top w10: U10.9@1409.16,1138.32 1409.16,1060.34 v2(1419,1050.5)
  PWR_03 w20: v2(1419,1050.5) 1474,995.5 v3(1474,555.5)
  Bottom w20: R131.2@1485,545.37 1562,545.37 D36.1@1562,553.24
M_1: J1.4 R38.1 | length 558.8
  Top w10: J1.4@745,2310 703,2268 703,1964.5 781,1886.5 R38.1@866.58,1886.5
M_2: J2.4 R76.1 | length 970.1
  Top w4: v2(1886.5,2002) R76.1@1895.08,2002
  Top w15: v2(2095.5,2425.5) 2095.5,2728 2153,2785.5 J2.4@2153,2843.5
  Bottom w15: v2(1886.5,2002) 1903,2002 1969,2068 1969,2271.5 2095.5,2398 v2(2095.5,2425.5)
M_3: J3.4 R112.1 | length 883
  Top w10: v2(1655.5,1837) 1977,1837 J3.4@2059.5,1919.5 ; v2(1666.5,1424.5) R112.1@1680.58,1424.5
  Bottom w10: v2(1655.5,1837) 1655.5,1826 1639,1809.5 1639,1474 1666.5,1446.5 v2(1666.5,1424.5)
M_4: J4.4 R148.1 | length 521.9
  Top w10: v2(1144,693) R148.1@1144,701.58
  Bottom w10: J4.4@654.5,695.5 684.5,665.5 1116.5,665.5 v2(1144,693)
MO_1: R38.2 U2.17 | length 662.4
  Top w10: R38.2@926.42,1886.5 926.42,1887.29 958.63,1919.5 1215.5,1919.5 1259.5,1963.5 1259.5,2111 1320,2171.5 U2.17@1383.86,2171.5
MO_2: R76.2 U6.17 | length 461.7
  Top w10: R76.2@1954.92,2002 2018.5,2002 2128.5,2112 2128.5,2183.5 2156,2211 2156,2233 2188,2265 U6.17@2252.86,2265
MO_3: R112.2 U5.17 | length 481.9
  Top w10: R112.2@1740.42,1424.5 1908.5,1424.5 1947,1463 1947,1577.5 1996.5,1627 U5.17@2071.36,1627
MO_4: R148.2 U8.17 | length 481.9
  Top w10: U8.17@897.5,1070.36 897.5,989 940.5,946 1061.5,946 1144,863.5 R148.2@1144,761.42
PWM_1: J1.3 R1.1 | length 144.1
  Top w10: R1.1@740.08,2216.5 740.08,2217.29 783.48,2260.69 795.69,2260.69 J1.3@845,2310
PWM_2: J2.3 R41.1 | length 793.9
  Top w10: R41.1@1828.42,2398 2123,2398 2183.5,2458.5 2183.5,2680.5 2253,2750 J2.3@2253,2843.5
PWM_3: J3.3 R77.1 | length 808.6
  Top w10: R77.1@1438.58,1754.5 1438.58,1787.5 1460.58,1809.5 2049.5,1809.5 J3.3@2159.5,1919.5
PWM_4: J4.3 R113.1 | length 261.9
  Top w10: J4.3@654.5,795.5 715,735 715,612.79 752.71,575.08 R113.1@753.5,575.08
S_1: C13.1 R20.1 R21.2 U2.8 | length 456.6
  Top w10: R21.2@799.92,2018.5 799.92,2019.29 832.13,2051.5 894.21,2051.5 R20.1@926.42,2019.29 ; R20.1@926.42,2018.5 R20.1@926.42,2019.29 ; C13.1@1052.92,2018.5 C13.1@1052.92,2019.29 ; U2.8@1179.14,2071.5 1105.13,2071.5 C13.1@1052.92,2019.29 ; R20.1@926.42,2019.29 958.63,2051.5 1020.71,2051.5 C13.1@1052.92,2019.29
S_2: C55.1 R60.1 R61.2 U6.8 | length 324
  Top w10: R60.1@1765.5,2131.58 R61.2@1831.5,2131.58 1832.29,2131.58 1867.71,2167 1922.71,2167 C55.1@1954.92,2134.79 ; C55.1@1954.92,2134 C55.1@1954.92,2134.79 ; U6.8@2048.14,2165 1985.13,2165 C55.1@1954.92,2134.79
S_3: C72.1 R96.1 R97.2 U5.8 | length 436.2
  Top w10: R96.1@1498.42,1556.5 1498.42,1557.29 1530.63,1589.5 1587.21,1589.5 R97.2@1619.42,1557.29 ; R97.2@1619.42,1556.5 R97.2@1619.42,1557.29 ; U5.8@1866.64,1527 1806.07,1527 1776.57,1556.5 C72.1@1740.42,1556.5 1740.42,1557.29 1708.21,1589.5 1651.63,1589.5 R97.2@1619.42,1557.29
S_4: C98.1 R132.1 R133.2 U8.8 | length 419
  Top w10: U8.8@997.5,865.64 997.5,817.5 1012,803 C98.1@1012,761.42 1011.21,761.42 979,729.21 979,667.13 R133.2@1011.21,634.92 ; R132.1@1012,508.42 1011.21,508.42 979,540.63 979,602.71 R133.2@1011.21,634.92 ; R133.2@1012,634.92 R133.2@1011.21,634.92
T_1: R22.1 R23.2 U2.9 | length 338.1
  Top w10: R23.2@926.42,1952.5 926.42,1953.29 958.63,1985.5 1017.5,1985.5 1051.32,1951.68 1051.32,1952.5 R22.1@1052.92,1952.5 1052.92,1953.29 1094.5,1994.87 1094.5,2024 1117,2046.5 U2.9@1179.14,2046.5
T_2: R62.1 R63.2 U6.9 | length 291.6
  Top w10: R62.1@1828.42,2068 1828.42,2068.79 1860.63,2101 1922.71,2101 R63.2@1954.92,2068.79 ; R63.2@1954.92,2068 R63.2@1954.92,2068.79 ; U6.9@2048.14,2140 2002,2140 1991,2129 1991,2104.87 R63.2@1954.92,2068.79
T_3: R98.1 R99.2 U5.9 | length 280.2
  Top w10: R98.1@1619.42,1490.5 1619.42,1491.29 1651.63,1523.5 1708.21,1523.5 1740.42,1491.29 R99.2@1740.42,1490.5 1787.5,1490.5 1799,1502 U5.9@1866.64,1502
T_4: R134.1 R135.2 U8.9 | length 282
  Top w10: U8.9@1022.5,865.64 1022.5,822.02 1078,766.52 R134.1@1078,761.42 1077.21,761.42 1045,729.21 1045,667.13 1077.21,634.92 R135.2@1078,634.92
U_1: C2.2 Q1.1 Q1.2 Q1.3 Q5.5 Q5.6 Q5.7 Q5.8 Q5.9 R8.1 R25.1 U1.18 | length 1758.7
  Top w4: v3(1320,3619) 1320,3629.51 Q1.3@1322.5,3632.01
  Top w10: R25.1@1468.5,2713.92 v2(1468.5,2744.5) ; 1618.98,2706 1634.1,2690.88 U1.18@1634.1,2678.68 U1.18@1634.1,2688.9
  Top w20: R8.1@1205.37,3712.5 v1(1309,3712.5) ; v3(1578.5,2777.5) 1578.5,2746.48 1618.98,2706
  PWR_03 w20: v3(1320,3619) 1144,3443 1144,2942 1270,2816 1540,2816 v3(1578.5,2777.5)
  Bottom w10: v3(1578.5,2777.5) 1606,2777.5 C2.2@1606,2778.37
  Bottom w12: v2(1468.5,2744.5) 1468.5,2777.5 1501.5,2810.5 1556.5,2810.5 1588.63,2778.37 C2.2@1606,2778.37
  other v1: 1342,3668.5 1408,3668.5 1375,3712.5 1441,3712.5 1276,3767.5 1342,3767.5 1408,3767.5 1474,3767.5 1534.5,3767.5 1276,3822.5 1342,3822.5 1408,3822.5 1474,3822.5 1534.5,3822.5 1276,3877.5 1342,3877.5 1408,3877.5 1474,3877.5 1534.5,3877.5
U_2: C49.2 Q13.1 Q13.2 Q13.3 Q14.5 Q14.6 Q14.7 Q14.8 Q14.9 R48.1 R65.1 U9.18 | length 1842.1
  Top w4: v2(3602.5,3019.5) 3618.51,3019.5 Q13.3@3621.01,3017
  Top w10: U9.18@2607.18,2677.9 2607.78,2678.5 2623.5,2678.5 2651,2706 2673,2706 ; v2(2788.5,2370.5) 2788.5,2354 2801.92,2340.58 R65.1@2801.92,2337.5
  Top w20: 2673,2706 2695,2706 2728,2739 ; v2(2733.5,2722.5) 2739,2728 2728,2739 ; v2(2887.5,2898.5) 2728,2739 ; R48.1@3696,3139.63 3696,3083.72 3701.5,3078.22 v1(3701.5,3025)
  PWR_03 w20: v2(2887.5,2898.5) 2887.5,3008.5 2942.5,3063.5 3476,3063.5 3520,3019.5 v2(3602.5,3019.5)
  Bottom w10: v2(2733.5,2722.5) 2733.5,2717 2728.87,2717 C49.2@2717.87,2706 2723.37,2700.5 2750,2700.5 2788.5,2662 v2(2788.5,2370.5)
  other v1: 3756.5,2816 3817,2816 3877.5,2816 3756.5,2876.5 3817,2876.5 3877.5,2876.5 3701.5,2904 3756.5,2937 3817,2937 3877.5,2937 3701.5,2964.5 3756.5,2997.5 3817,2997.5 3877.5,2997.5 3756.5,3058 3817,3058 3877.5,3058
U_3: C66.2 Q22.1 Q22.2 Q22.3 Q23.5 Q23.6 Q23.7 Q23.8 Q23.9 R84.1 R101.1 U7.18 | length 1738.1
  Top w4: v2(3602.5,1798.5) 3618.51,1798.5 Q22.3@3621.01,1796
  Top w10: U7.18@2596.18,1324.9 2596.78,1325.5 2612.5,1325.5 2640,1353 ; v2(2656.5,1463) R101.1@2656.5,1493.58
  Top w20: 2640,1353 2656.5,1369.5 2673,1369.5 2684,1380.5 ; v2(2700.5,1364) 2684,1380.5 ; v2(2860,1556.5) 2684,1380.5 ; v1(3690.5,1842.5) 3690.5,1918.63 R84.1@3696,1924.13
  PWR_03 w20: v2(2860,1556.5) 2882,1578.5 2882,1820.5 2926,1864.5 3536.5,1864.5 v2(3602.5,1798.5)
  Bottom w10: v2(2656.5,1463) 2728.87,1390.63 C66.2@2728.87,1347.5
  Bottom w20: v2(2700.5,1364) 2728.87,1353.65 C66.2@2728.87,1347.5
  other v1: 3762,1556.5 3817,1556.5 3877.5,1556.5 3762,1628 3817,1628 3877.5,1628 3690.5,1633.5 3762,1699.5 3817,1699.5 3877.5,1699.5 3690.5,1705 3762,1771 3817,1771 3877.5,1771 3690.5,1776.5 3762,1837 3817,1837 3877.5,1837
U_4: C92.2 Q31.1 Q31.2 Q31.3 Q32.5 Q32.6 Q32.7 Q32.8 Q32.9 R120.1 R137.1 U10.18 | length 2400.7
  Top w10: R137.1@1116.5,1349.92 R137.1@1116.5,1358.5 ; U10.18@1501.68,1269.9 1502.28,1270.5 1512.5,1270.5 1529,1287 1567.5,1287
  Top w15: R137.1@1116.5,1349.92 1117.29,1349.92 1164.37,1397 1463,1397 v2(1463,1391.5)
  Top w20: 1567.5,1287 v2@1622.5,1287 ; v2(1622.5,1292.5) v2@1622.5,1287 ; v1(2150.5,214.5) 2172.5,214.5 2200,242 R120.1@2276.13,242 ; v2(2255,1050.5) 2018.5,1287 v2@1622.5,1287
  PWR_03 w20: v3(2161.5,330) 2326.5,495 2326.5,977.11 2254.06,1049.56 v2(2255,1050.5)
  Bottom w10: C92.2@1612.37,1292.5 v2(1622.5,1292.5)
  Bottom w12: v2(1463,1391.5) 1513.37,1391.5 C92.2@1612.37,1292.5
  other v1: 1991,55 2062.5,55 2128.5,55 2194.5,55 1952.5,104.5 2024,104.5 2090,104.5 2156,104.5 1985.5,159.5 2057,159.5 2123,159.5 2189,159.5 2018.5,214.5 2084.5,214.5 2018.5,275 2084.5,275 2150.5,275
UH_1: U1.22 U2.10 | length 895.8
  Top w10: U2.10@1179.14,2021.5 1179.14,2020.68 1237.5,2020.68 1237.5,2018.5 v2(1232,2018.5) ; v2(1468.5,2128.5) 1474,2134 1474,2271.5 1518,2315.5 1518,2563 1541.16,2586.16 U1.22@1600.32,2586.16
  Bottom w10: v2(1232,2018.5) 1358.5,2018.5 v2(1468.5,2128.5)
UH_2: U6.10 U9.22 | length 1051.2
  Top w10: U6.10@2048.14,2115 2095.5,2115 2106.5,2126 2106.5,2194.5 2134,2222 2134,2348.5 2211,2425.5 2211,2667.5 2326.5,2783 2481.66,2783 2514.66,2750 U9.22@2514.66,2711.68
UH_3: U5.10 U7.22 | length 711.3
  Top w10: U5.10@1866.64,1477 1919.5,1477 v2(1919.5,1479.5) ; v2(2502.5,1397) 2503.66,1395.84 U7.22@2503.66,1358.68
  Bottom w10: v2(1919.5,1479.5) 2167,1479.5 2249.5,1397 v2(2502.5,1397)
UH_4: U8.10 U10.22 | length 827
  Top w10: U8.10@1047.5,865.64 1047.5,898.12 v2(1050.5,918.5) ; v2(1215.5,1364) 1375.63,1364 1409.16,1330.47 U10.22@1409.16,1303.68
  Bottom w10: v2(1050.5,918.5) 1050.5,1243 1133,1325.5 1177,1325.5 v2(1215.5,1364)
UL_1: U1.1 U2.11 | length 641.7
  Top w10: U2.11@1383.86,2021.5 1463,2021.5 1556.5,2115 1556.5,2238.5 1633.79,2315.79 U1.1@1633.79,2513.32
UL_2: U6.11 U9.1 | length 799.9
  Top w10: U6.11@2252.86,2115 2310,2115 2370.5,2175.5 2370.5,2381.5 2293.5,2458.5 2293.5,2634.21 2337.5,2678.21 U9.1@2441.82,2678.21
UL_3: U5.11 U7.1 | length 422.3
  Top w10: U5.11@2071.36,1477 2128.5,1477 2280.29,1325.21 U7.1@2430.82,1325.21
UL_4: U8.11 U10.1 | length 405.3
  Top w10: U8.11@1047.5,1070.36 1047.5,1127.5 1190.5,1270.5 1236.91,1270.5 1237.2,1270.21 U10.1@1336.32,1270.21
V_1: C8.2 Q6.1 Q6.2 Q6.3 Q7.5 Q7.6 Q7.7 Q7.8 Q7.9 R12.1 R28.1 U1.15 | length 1626.7
  Top w4: v2(1716,3613.5) 1716,3624.01 Q6.3@1718.5,3626.51
  Top w10: R28.1@1468.5,2581.92 v2(1468.5,2612.5) ; U1.15@1692.84,2678.68 1692.84,2732.34 1699.5,2739 v3(1699.5,2794)
  Top w20: R12.1@1601.37,3707 v1(1677.5,3707)
  PWR_03 w20: v3(1699.5,2794) 1672,2794 1523.5,2942.5 1523.5,3531 1606,3613.5 v2(1716,3613.5)
  Bottom w4: C8.2@1683,2778.37 1698.63,2794 v3(1699.5,2794)
  Bottom w12: v2(1468.5,2612.5) 1468.5,2656.5 1556.5,2744.5 1644.5,2744.5 1680.68,2780.68 1683,2780.68 C8.2@1683,2778.37
  other v1: 1743.5,3657.5 1804,3657.5 1864.5,3657.5 1743.5,3707 1804,3707 1864.5,3707 1677.5,3767.5 1743.5,3767.5 1804,3767.5 1864.5,3767.5 1925,3767.5 1677.5,3822.5 1743.5,3822.5 1804,3822.5 1864.5,3822.5 1925,3822.5 1677.5,3877.5 1743.5,3877.5 1804,3877.5 1864.5,3877.5 1925,3877.5
V_2: C50.2 Q15.1 Q15.2 Q15.3 Q16.5 Q16.6 Q16.7 Q16.8 Q16.9 R52.1 R68.1 U9.15 | length 1667.5
  Top w4: v2(3602.5,2618) 3605.5,2621 Q15.3@3621.01,2621
  Top w10: U9.15@2607.18,2619.16 2673,2619.16 2685.16,2607 2706,2607 ; R68.1@2669.92,2337.5 2669.92,2367.42 v2(2673,2370.5)
  Top w20: 2706,2607 2755.5,2607 v2(2882,2733.5) ; v1(3690.5,2662) 3690.5,2738.13 R52.1@3696,2743.63
  PWR_03 w20: v2(2882,2733.5) 2931.5,2783 3459.5,2783 3602.5,2640 v2(3602.5,2618)
  Bottom w10: v2(2673,2370.5) 2761,2458.5 2761,2618 2750,2629 C50.2@2717.87,2629
  Bottom w20: C50.2@2717.87,2629 2727.56,2629 2727.56,2619.32 v2(2733.5,2596)
  other v1: 3756.5,2425.5 3817,2425.5 3877.5,2425.5 3690.5,2480.5 3756.5,2480.5 3817,2480.5 3877.5,2480.5 3690.5,2541 3756.5,2541 3817,2541 3877.5,2541 3690.5,2601.5 3756.5,2601.5 3817,2601.5 3877.5,2601.5 3756.5,2662 3817,2662 3877.5,2662
V_3: C67.2 Q24.1 Q24.2 Q24.3 Q25.5 Q25.6 Q25.7 Q25.8 Q25.9 R88.1 R104.1 U7.15 | length 1711.8
  Top w4: v2(3597,1369.5) 3618.51,1369.5 Q24.3@3621.01,1367
  Top w10: U7.15@2596.18,1266.16 2622.34,1266.16 2623.5,1265 2695,1265 2700.5,1270.5 ; R104.1@2656.5,1636.58 2656.5,1636.99 2657.7,1636.99 2694.59,1600.09 v2(2695,1600.5) ; 2711.5,1281.5 2700.5,1270.5 ; v2(2722.5,1254) 2706,1270.5 2700.5,1270.5
  Top w20: 2711.5,1281.5 v2(2887.5,1457.5) ; v1(3690.5,1408) 3690.5,1484.13 R88.1@3701.5,1495.13
  PWR_03 w20: v2(2887.5,1457.5) 3052.5,1457.5 3074.5,1435.5 3531,1435.5 v2(3597,1369.5)
  Bottom w10: v2(2695,1600.5) 2695,1463 2766.5,1391.5 2766.5,1308.13 C67.2@2728.87,1270.5 2722.5,1264.13 v2(2722.5,1254)
  other v1: 3756.5,1155 3811.5,1155 3872,1155 3690.5,1221 3756.5,1221 3811.5,1221 3872,1221 3690.5,1287 3756.5,1287 3811.5,1287 3872,1287 3690.5,1347.5 3756.5,1347.5 3811.5,1347.5 3872,1347.5 3756.5,1408 3811.5,1408 3872,1408
V_4: C93.2 Q33.1 Q33.2 Q33.3 Q34.5 Q34.6 Q34.7 Q34.8 Q34.9 R124.1 R140.1 U10.15 | length 2105.3
  Top w10: U10.15@1501.68,1211.16 1584,1211.16 1584,1210
  Top w12: R140.1@1116.5,1419 R140.1@1116.5,1422.08
  Top w15: R140.1@1116.5,1422.08 1124.42,1430 v2(1463,1430)
  Top w20: 1584,1210 v2@1606,1210 ; v2(1606,1204.5) v2@1606,1210 ; 1816,195.34 1816.21,195.34 1807.05,231 R124.1@1869.13,231 ; v2(1875.5,1056) 1721.5,1210 v2@1606,1210
  PWR_03 w20: v3(1760,330) 1930.5,500.5 1930.5,979 1875.5,1034 v2(1875.5,1056)
  Bottom w10: v2(1606,1204.5) 1606,1214.63 C93.2@1612.37,1221
  Bottom w12: v2(1463,1430) 1540,1430 1655.5,1314.5 1655.5,1232 1644.5,1221 C93.2@1612.37,1221
  other v1: 1551,60.5 1611.5,60.5 1672,60.5 1732.5,60.5 1793,60.5 1551,115.5 1611.5,115.5 1672,115.5 1732.5,115.5 1793,115.5 1551,170.5 1611.5,170.5 1672,170.5 1732.5,170.5 1793,170.5 1639,220 1699.5,220 1760,220 1633.5,275 1694,275 1754.5,275
VB1_1: C2.1 D1.1 U1.20 | length 163.8
  Top w9: v2(1562,2629) 1565.47,2625.53 U1.20@1600.32,2625.53
  Bottom w15: v2(1562,2629) 1606,2629 D1.1@1606,2637.74
  Bottom w30: D1.1@1606,2637.74 1601.32,2637.74 1601.32,2699.63 C2.1@1606,2699.63
VB1_2: C49.1 D10.1 U9.20 | length 182
  Top w10: U9.20@2554.03,2711.68 2554.03,2757.53 v2(2557.5,2761)
  Bottom w10: v2(2557.5,2761) 2582.74,2735.76 D10.1@2582.74,2706
  Bottom w30: D10.1@2582.74,2706 2582.74,2710.68 2639.13,2710.68 C49.1@2639.13,2706
VB1_3: C66.1 D19.1 U7.20 | length 228.5
  Top w10: U7.20@2543.03,1358.68 2543.03,1393.53 2568.5,1419 v2(2590.5,1419)
  Bottom w20: v2(2590.5,1419) 2590.5,1347.5 D19.1@2588.24,1347.5 C66.1@2650.13,1347.5
VB1_4: C92.1 D28.1 U10.20 | length 184.5
  Top w10: U10.20@1448.53,1303.68 1448.53,1327.53 v2(1474,1353)
  Bottom w20: D28.1@1471.74,1292.5 1474,1292.5 v2(1474,1353)
  Bottom w30: D28.1@1471.74,1292.5 C92.1@1533.63,1292.5
VB2_1: C8.1 D2.1 U1.17 | length 149.5
  Top w10: v2(1650,2717) 1653.47,2713.53 U1.17@1653.47,2678.68
  Bottom w10: v2(1650,2717) 1668.32,2714.32 1683,2714.32 C8.1@1683,2699.63
  Bottom w30: D2.1@1683,2637.74 C8.1@1683,2699.63
VB2_2: C50.1 D11.1 U9.17 | length 178.8
  Top w10: U9.17@2607.18,2658.53 2653.03,2658.53 v2(2662,2667.5)
  Bottom w10: C50.1@2639.13,2629 2653.82,2629 2653.82,2643.68 v2(2662,2667.5)
  Bottom w30: D11.1@2582.74,2629 2582.74,2633.68 2639.13,2633.68 C50.1@2639.13,2629
VB2_3: C67.1 D20.1 U7.17 | length 155.8
  Top w10: U7.17@2596.18,1305.53 2642.03,1305.53 v2(2645.5,1309)
  Bottom w20: D20.1@2588.24,1270.5 C67.1@2650.13,1270.5 2645.5,1270.5 v2(2645.5,1309)
VB2_4: C93.1 D29.1 U10.17 | length 141
  Top w10: U10.17@1501.68,1250.53 1536.53,1250.53 v2(1540,1254)
  Bottom w20: C93.1@1533.63,1221 1540,1221 v2(1540,1254)
  Bottom w30: D29.1@1471.74,1221 C93.1@1533.63,1221
VB3_1: C9.1 D3.1 U1.14 | length 158.1
  Top w10: U1.14@1712.53,2678.68 1712.53,2697.03 v2(1732.5,2717)
  Bottom w15: v2(1732.5,2717) 1754.5,2711.82 1760,2711.82 C9.1@1760,2699.63
  Bottom w30: D3.1@1760,2637.74 1755.32,2637.74 1755.32,2699.63 C9.1@1760,2699.63
VB3_2: C51.1 D12.1 U9.14 | length 176
  Top w10: U9.14@2607.18,2599.47 2647.53,2599.47 v2(2662,2585)
  Bottom w10: C51.1@2639.13,2552 2653.82,2552 2653.82,2566.68 v2(2662,2585)
  Bottom w30: D12.1@2582.74,2552 2582.74,2556.68 2639.13,2556.68 C51.1@2639.13,2552
VB3_3: C68.1 D21.1 U7.14 | length 160.9
  Top w10: U7.14@2596.18,1246.47 2634.5,1246.47 2651,1229.97 v2(2651,1221)
  Bottom w10: C68.1@2650.13,1193.5 2651,1193.5 v2(2651,1221)
  Bottom w20: D21.1@2588.24,1193.5 C68.1@2650.13,1193.5
VB3_4: C94.1 D30.1 U10.14 | length 175.2
  Top w10: U10.14@1501.68,1191.47 1553.03,1191.47 v2(1562,1182.5)
  Bottom w20: C94.1@1533.63,1149.5 1543.32,1149.5 1543.32,1159.18 v2(1562,1182.5)
  Bottom w30: D30.1@1471.74,1149.5 C94.1@1533.63,1149.5
VCC_5.0V: C4.1 C5.1 C27.1 C28.1 C44.1 C45.1 C46.1 C62.1 C63.1 C88.1 C89.1 J1.1 J2.1 J3.1 J4.1 R20.2 R22.2 R24.2 R60.2 R62.2 R64.2 R96.2 R98.2 R100.2 R132.2 R134.2 R136.2 U2.5 U4.2 U4.4 U5.5 U6.5 U8.5 | length 854.9
  Top w10: v2(852.5,2018.5) R20.2@866.58,2018.5 ; U8.5@922.5,865.64 922.5,898.12 v2(929.5,924) ; v2(979,1886.5) R24.2@993.08,1886.5 ; v2(979,1952.5) R22.2@993.08,1952.5 ; R132.2@1012,448.58 1050.5,487.08 v2(1050.5,495) ; v2(1078,693) R134.2@1078,701.58 ; v2(1144,544.5) R136.2@1144,575.08 ; U2.5@1179.14,2146.5 1211.62,2146.5 v2(1237.5,2139.5) ; R96.2@1438.58,1556.5 1438.58,1581.58 1441,1584 v2(1441,1589.5) ; v2(1529,1501.5) 1556.5,1501.5 1559.58,1498.42 R98.2@1559.58,1490.5 R100.2@1559.58,1424.5 ; v2(1738,2002) R64.2@1768.58,2002 ; v2(1738,2068) R62.2@1768.58,2068 ; R60.2@1765.5,2191.42 1774.08,2191.42 v2(1776.5,2189) ; U5.5@1866.64,1602 1899.12,1602 v2(1925,1595) ; U6.5@2048.14,2240 2080.62,2240 v2(2106.5,2233)
  Bottom w10: v2(929.5,924) 929.5,927.08 C89.1@942.92,940.5 C88.1@942.92,885.5 ; C4.1@1210,2120.58 1237.5,2120.58 ; v2(1237.5,2139.5) 1237.5,2120.58 ; C5.1@1265,2120.58 1237.5,2120.58 ; C62.1@1875.5,1581.58 C63.1@1930.5,1581.58 ; C27.1@2068,2225.08 C28.1@2123,2225.08
  other v3: 137.5,588.5 214.5,588.5 297,588.5 137.5,649 214.5,649 297,649 137.5,709.5 214.5,709.5 297,709.5 137.5,770 214.5,770 297,770 137.5,836 214.5,836 297,836